# Altium PCB PCB_PreDesign.PcbDoc
Units mil, origin at the board's own origin, x right, y up, seen from the top; angles counter-clockwise.
Board outline 6000 x 4000 mil, 2 copper layers (Top Layer, Bottom Layer); 24 components, 19 nets, 108 pads, 1 vias.
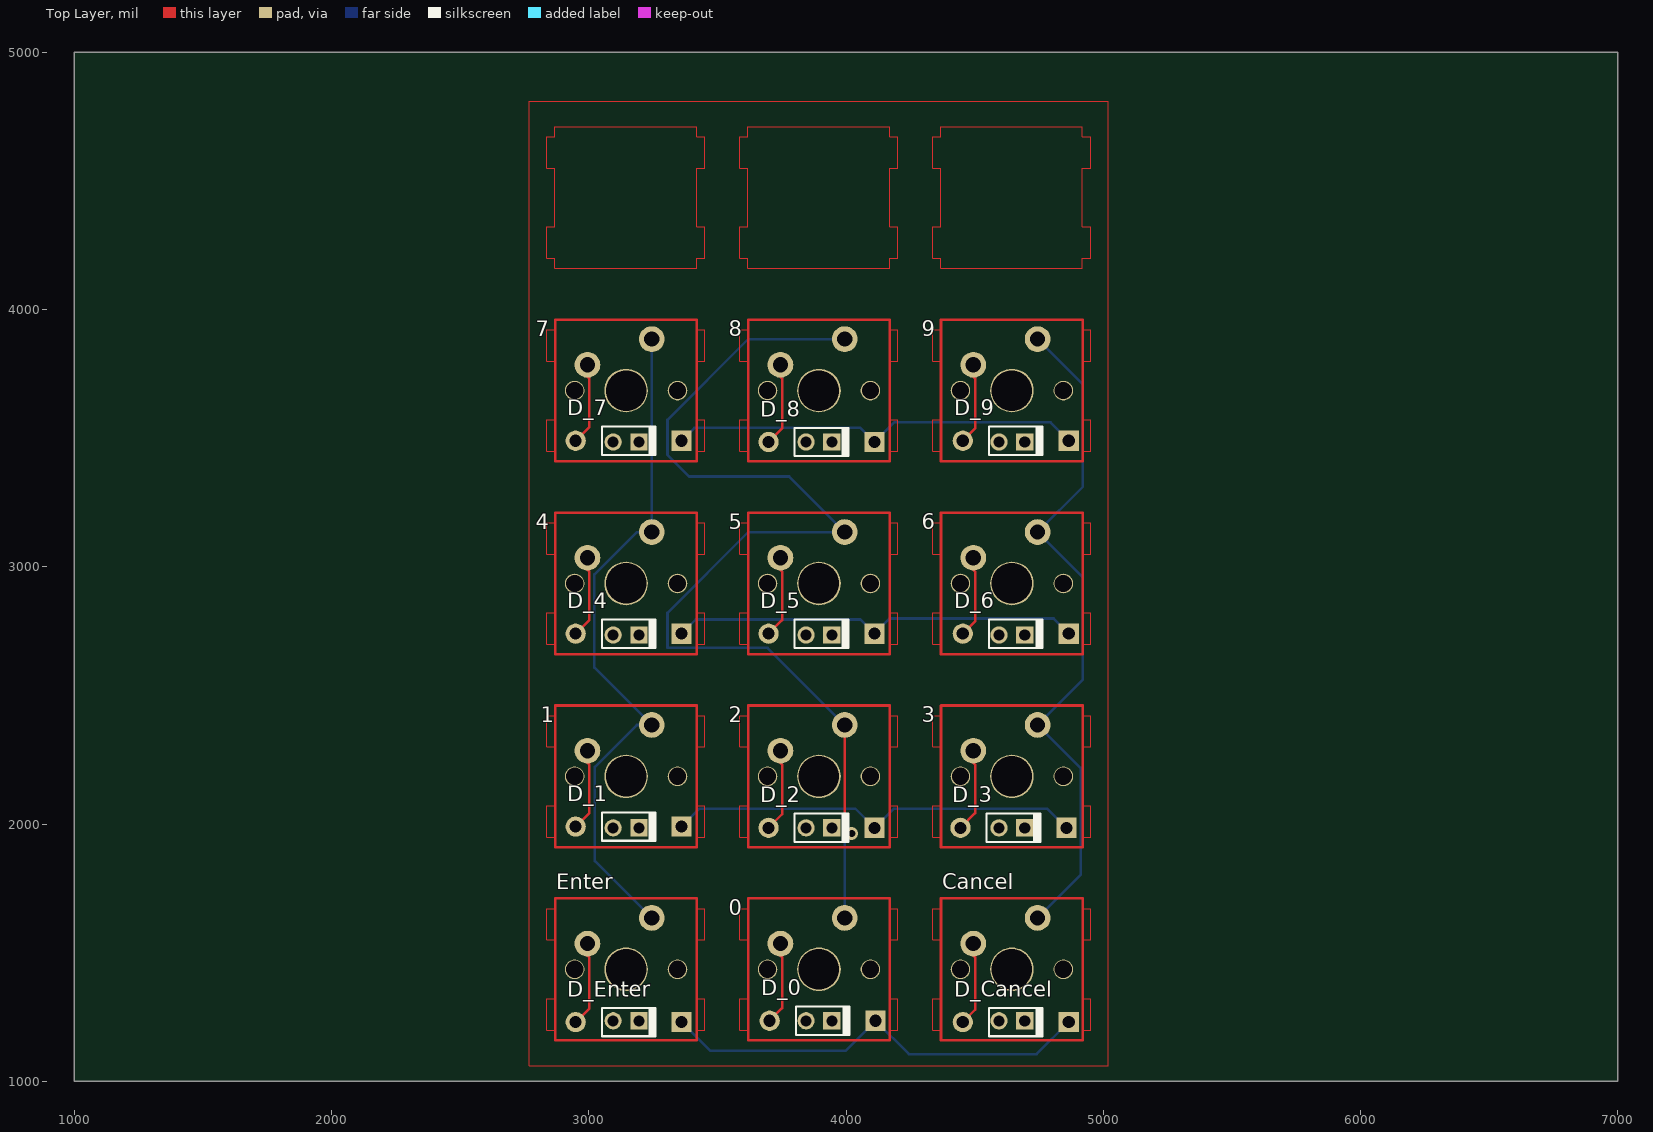
[diagram p0: Top Layer view]
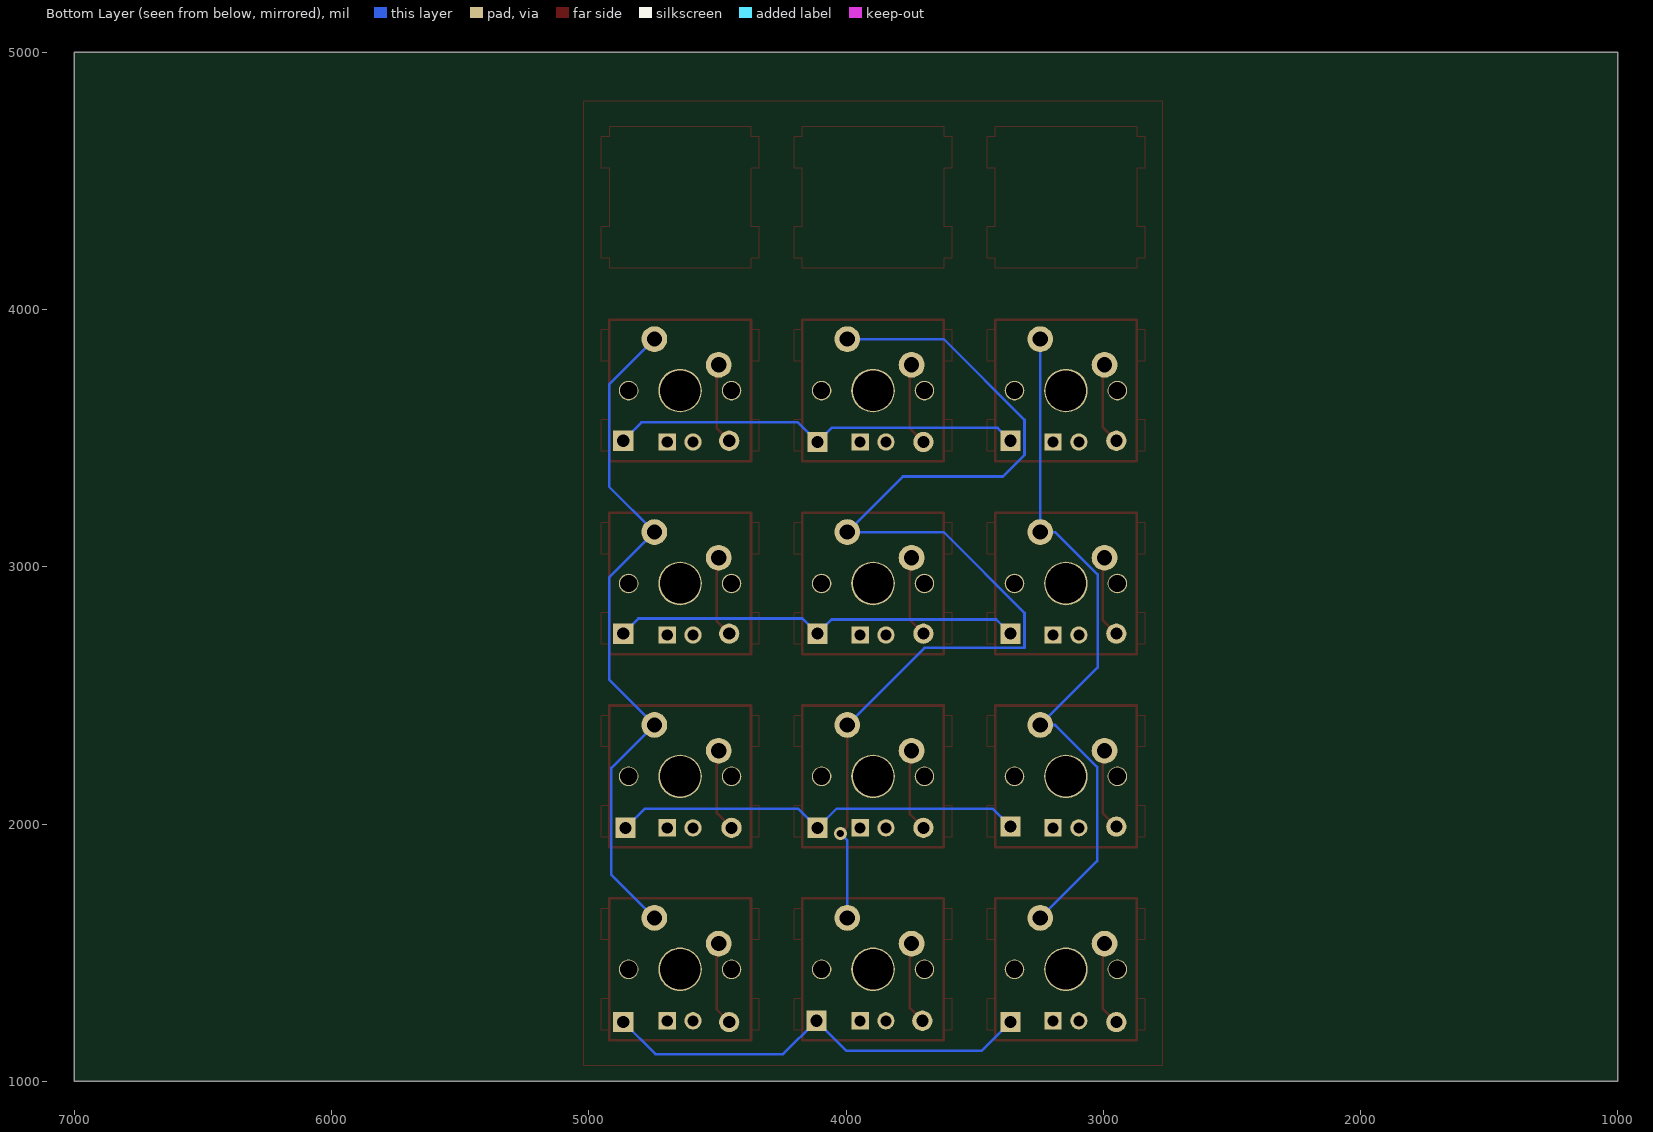
[diagram p1: Bottom Layer view, seen from below]

## Layer stack, top to bottom
Top Solder: solder mask 0.4, Solder Resist, Dk 3.5
Top Layer: signal copper 1.4
Dielectric 1: dielectric 12.6, FR-4, Dk 4.8
Bottom Layer: signal copper 1.4
Bottom Solder: solder mask 0.4, Solder Resist, Dk 3.5

## Board outline
1000,1000 7000,1000 7000,5000 1000,5000

## Design rules (kind name [scope] priority, off if disabled: settings)
Clearance [All] p1: gap=10 ignorepadtopadclearanceinfootprint=FALSE except(0: Arc-Hole Track-Hole SMDPad-Hole THPad-Hole Via-Hole Fill-Hole Poly-Hole Region-Hole Text-Hole)
PolygonConnect [All] p1: connectstyle=Relief reliefconductorwidth=10 reliefentries=4 polygonreliefangle="90 Angle" airgapwidth=10
RoutingVias [All] p1: holewidth=28 width=50 viastyle="Through Hole" minholewidth=28 minwidth=50 maxholewidth=28 maxwidth=50
SolderMaskExpansion [All] p1: expansion=4
Width [All] p1: maxlimit=10 minlimit=10 preferedwidth=10
30 further rules are at their usual default settings.

## Components (designator, comment, footprint, x,y, rotation, side; value= is the part's Value field where it differs from the comment)
0 "Key0" "Cherry Standard MX Switch" 3895,1435 r0 top
1 "Key1" "Cherry Standard MX Switch" 3145,2185 r0 top
2 "Key2" "Cherry Standard MX Switch" 3895,2185 r0 top
3 "Key3" "Cherry Standard MX Switch" 4645,2185 r0 top
4 "Key4" "Cherry Standard MX Switch" 3145,2935 r0 top
5 "Key5" "Cherry Standard MX Switch" 3895,2935 r0 top
6 "Key6" "Cherry Standard MX Switch" 4645,2935 r0 top
7 "Key7" "Cherry Standard MX Switch" 3145,3685 r0 top
8 "Key8" "Cherry Standard MX Switch" 3895,3685 r0 top
9 "Key9" "Cherry Standard MX Switch" 4645,3685 r0 top
Cancel "Key_Cancel" "Cherry Standard MX Switch" 4645,1435 r0 top
D_0 "Diode 1N4934" DO-41 3909.09,1235 r0 top
D_1 "Diode 1N4934" DO-41 3155,1990 r0 top
D_2 "Diode 1N4934" DO-41 3905,1985 r0 top
D_3 "Diode 1N4934" DO-41 4650.91,1985 r0 top
D_4 "Diode 1N4934" DO-41 3155,2740 r0 top
D_5 "Diode 1N4934" DO-41 3905,2740 r0 top
D_6 "Diode 1N4934" DO-41 4660,2740 r0 top
D_7 "Diode 1N4934" DO-41 3155,3490 r0 top
D_8 "Diode 1N4934" DO-41 3905,3485 r0 top
D_9 "Diode 1N4934" DO-41 4660,3490 r0 top
D_Cancel "Diode 1N4934" DO-41 4660,1230 r0 top
D_Enter "Diode 1N4934" DO-41 3155,1230 r0 top
Enter "Key_Enter" "Cherry Standard MX Switch" 3145,1435 r0 top

## Footprints (in the part's own frame and the unit in brackets; to place one, negate y for a bottom-side part, rotate by r counter-clockwise, add the part's x,y. Pads: shape width x height; smd on the part's side, far side on the other; paste and mask are expansions set on the pad)
"Cherry Standard MX Switch" [mm]
  round 2.54 hole 1.5: 0(-3.81,2.54) 1(2.54,5.08)
  round 1.702 hole 1.092: 2(-1.27,-5.08)
  rect 1.702x1.702 hole 1.092: 3(1.27,-5.08)
  round 4.3 hole 4: 4(0,0)
  round 1.93 hole 1.712 unplated: 5(5.08,0)
  round 1.93 hole 1.712: 6(-5.08,0)
  Top Layer lines w0.254: -7,-7 -7,7 7,7 7,-7 -7,-7
DO-41 [mm] "Diode, Axial; Body 5.2 x 2.7 mm (LxDia. max), Lead Dia. 0.86 mm (max)"
  round 2 hole 1.2: 1(-5.23,0)
  rect 2x2 hole 1.2: 2(5.23,0)
  silkscreen extent -2.65,-1.4 2.75,1.4

## Part data
0 1 2 3 4 5 6 7 8 9 Cancel Enter: library part "Cherry MX"
D_0 D_1 D_2 D_3 D_4 D_5 D_6 D_7 D_8 D_9 D_Cancel D_Enter: "1 Amp Fast Recovery Rectifier", Code_JEDEC=DO-204-AL, ComponentLink1Description="Manufacturer Link", ComponentLink1URL=http://www.fairchildsemi.com/, ComponentLink2Description=Datasheet, ComponentLink2URL=http://www.fairchildsemi.com/ds/1N%2F1N4934.pdf, DatasheetVersion=1999, LatestRevisionDate=17-Jul-2002, LatestRevisionNote="Re-released for DXP Platform.", PackageDescription="Diode, Axial; Body 5.2 x 2.7 mm (LxDia. max), Lead Dia. 0.86 mm (max)", PackageReference=DO-41, PackageVersion=Aug-1999, Published=8-Jun-2000, Publisher="Altium Limited"

## Via types
v1: diameter 50, hole 28, Top Layer to Bottom Layer, 1 vias

## Nets (pads, with @x,y where several pads share a name; then routed paths per layer and width w, separated by ;. In a path a pad name is that pad's centre, name@x,y a point inside that pad or via, vN(x,y) a via of type N, cw(c..) or ccw(c..) an arc to the next point about the centre after c; other vN are vias at no path point)
Net0_0: 0.0 D_0.1 | length 323.1
  Top Layer w10: D_0.1 3752,1283.81 3752,1481 3745,1488 0.0
Net0_1: 0.1 2.1 5.1 8.1 | length 4309
  Top Layer w10: 2.1 3995,1990 v1(4022,1963)
  Bottom Layer w10: 0.1 3995,1936 v1(4022,1963) ; 2.1 3695,2685 3306,2685 3306,2821 3620,3135 5.1 3779,3351 3390,3351 3306,3435 3306,3571 3620,3885 8.1
Net1_0: 1.0 D_1.1 | length 319.8
  Top Layer w10: D_1.1 3002,2042.91 3002,2231 2995,2238 1.0
Net1_1: 1.1 4.1 7.1 Enter.1 | length 2685.9
  Bottom Layer w10: Enter.1 3024,1856 3024,2222.08 3186.92,2385 1.1 3022,2608 3022,2970.08 3186.92,3135 4.1 7.1
Net2_0: 2.0 D_2.1 | length 324.8
  Top Layer w10: D_2.1 3752,2037.91 3752,2231 3745,2238 2.0
Net3_0: 3.0 D_3.1 | length 326.5
  Top Layer w10: D_3.1 4502,2042 4502,2231 4495,2238 3.0
Net3_1: 3.1 6.1 9.1 Cancel.1 | length 2680
  Bottom Layer w10: Cancel.1 4912,1802 4912,2218 3.1 4921,2561 4921,2959 6.1 4921,3311 4921,3709 9.1
Net4_0: 4.0 D_4.1 | length 319.8
  Top Layer w10: D_4.1 3002,2792.91 3002,2981 2995,2988 4.0
Net5_0: 5.0 D_5.1 | length 319.8
  Top Layer w10: D_5.1 3752,2792.91 3752,2981 3745,2988 5.0
Net6_0: 6.0 D_6.1 | length 317.7
  Top Layer w10: D_6.1 4502,2787.91 4502,2981 4495,2988 6.0
Net7_0: 7.0 D_7.1 | length 319.8
  Top Layer w10: D_7.1 3002,3542.91 3002,3731 2995,3738 7.0
Net8_0: 8.0 D_8.1 | length 324.8
  Top Layer w10: D_8.1 3752,3537.91 3752,3731 3745,3738 8.0
Net9_0: 9.0 D_9.1 | length 317.7
  Top Layer w10: D_9.1 4502,3537.91 4502,3731 4495,3738 9.0
NetCancel_0: Cancel.0 D_Cancel.1 | length 327.7
  Top Layer w10: D_Cancel.1 4502,1277.91 4502,1481 4495,1488 Cancel.0
NetD_0_2: D_0.2 D_Cancel.2 D_Enter.2 | length 1705.5
  Bottom Layer w10: D_Enter.2 3472.91,1118 3998,1118 D_0.2 4245,1105 4740.91,1105 D_Cancel.2
NetD_1_2: D_1.2 D_2.2 D_3.2 | length 1618.1
  Bottom Layer w10: D_1.2 3430.91,2060 4035.91,2060 D_2.2 4185.91,2060 4781.81,2060 D_3.2
NetD_4_2: D_4.2 D_5.2 D_6.2 | length 1599.4
  Bottom Layer w10: D_4.2 3415.91,2795 4055.91,2795 D_5.2 4169.91,2799 4806.91,2799 D_6.2
NetD_7_2: D_7.2 D_8.2 D_9.2 | length 1609.4
  Bottom Layer w10: D_7.2 3410.91,3540 4055.91,3540 D_8.2 4186.91,3561 4794.91,3561 D_9.2
NetD_Enter_1: D_Enter.1 Enter.0 | length 329.8
  Top Layer w10: D_Enter.1 3002,1282.91 3002,1481 2995,1488 Enter.0
pads on no net: 0.2 0.3 0.4 0.5 0.6 1.2 1.3 1.4 1.5 1.6 2.2 2.3 2.4 2.5 2.6 3.2 3.3 3.4 3.5 3.6 4.2 4.3 4.4 4.5 4.6 5.2 5.3 5.4 5.5 5.6 6.2 6.3 6.4 6.5 6.6 7.2 7.3 7.4 7.5 7.6 8.2 8.3 8.4 8.5 8.6 9.2 9.3 9.4 9.5 9.6 Cancel.2 Cancel.3 Cancel.4 Cancel.5 Cancel.6 Enter.2 Enter.3 Enter.4 Enter.5 Enter.6
copper on no net: | length 48852.3
  Top Layer w0.5: 2768.74,1060.15 2768.74,4810.14 5018.75,4810.14 5018.75,1060.15 2768.74,1060.15 ; 2836.61,1198.93 2868.14,1198.93 2868.14,1159.59 3419.3,1159.59 3419.3,1198.93 3450.82,1198.93 3450.82,1321 3419.3,1321 3419.3,1549.4 3450.82,1549.4 3450.82,1671.37 3419.3,1671.37 3419.3,1710.75 2868.14,1710.75 2868.14,1671.37 2836.61,1671.37 2836.61,1549.4 2868.14,1549.4 2868.14,1321 2836.61,1321 2836.61,1198.93 ; 2836.61,1948.93 2868.14,1948.93 2868.14,1909.59 3419.3,1909.59 3419.3,1948.93 3450.82,1948.93 3450.82,2071 3419.3,2071 3419.3,2299.4 3450.82,2299.4 3450.82,2421.37 3419.3,2421.37 3419.3,2460.75 2868.14,2460.75 2868.14,2421.37 2836.61,2421.37 2836.61,2299.4 2868.14,2299.4 2868.14,2071 2836.61,2071 2836.61,1948.93 ; 2836.61,2698.93 2868.14,2698.93 2868.14,2659.6 3419.3,2659.6 3419.3,2698.93 3450.82,2698.93 3450.82,2821 3419.3,2821 3419.3,3049.35 3450.82,3049.35 3450.82,3171.36 3419.3,3171.36 3419.3,3210.75 2868.14,3210.75 2868.14,3171.36 2836.61,3171.36 2836.61,3049.35 2868.14,3049.35 2868.14,2821 2836.61,2821 2836.61,2698.93 ; 2836.61,3448.93 2868.14,3448.93 2868.14,3409.6 3419.3,3409.6 3419.3,3448.93 3450.82,3448.93 3450.82,3571 3419.3,3571 3419.3,3799.35 3450.82,3799.35 3450.82,3921.36 3419.3,3921.36 3419.3,3960.75 2868.14,3960.75 2868.14,3921.36 2836.61,3921.36 2836.61,3799.35 2868.14,3799.35 2868.14,3571 2836.61,3571 2836.61,3448.93 ; 2836.61,4198.93 2868.14,4198.93 2868.14,4159.6 3419.3,4159.6 3419.3,4198.93 3450.82,4198.93 3450.82,4321 3419.3,4321 3419.3,4549.35 3450.82,4549.35 3450.82,4671.36 3419.3,4671.36 3419.3,4710.75 2868.14,4710.75 2868.14,4671.36 2836.61,4671.36 2836.61,4549.35 2868.14,4549.35 2868.14,4321 2836.61,4321 2836.61,4198.93 ; 3586.61,1198.93 3618.14,1198.93 3618.14,1159.59 4169.29,1159.59 4169.29,1198.93 4200.82,1198.93 4200.82,1321 4169.29,1321 4169.29,1549.4 4200.82,1549.4 4200.82,1671.37 4169.29,1671.37 4169.29,1710.75 3618.14,1710.75 3618.14,1671.37 3586.61,1671.37 3586.61,1549.4 3618.14,1549.4 3618.14,1321 3586.61,1321 3586.61,1198.93 ; 3586.61,1948.93 3618.14,1948.93 3618.14,1909.59 4169.29,1909.59 4169.29,1948.93 4200.82,1948.93 4200.82,2071 4169.29,2071 4169.29,2299.4 4200.82,2299.4 4200.82,2421.37 4169.29,2421.37 4169.29,2460.75 3618.14,2460.75 3618.14,2421.37 3586.61,2421.37 3586.61,2299.4 3618.14,2299.4 3618.14,2071 3586.61,2071 3586.61,1948.93 ; 3586.61,2698.93 3618.14,2698.93 3618.14,2659.6 4169.29,2659.6 4169.29,2698.93 4200.82,2698.93 4200.82,2821 4169.29,2821 4169.29,3049.35 4200.82,3049.35 4200.82,3171.36 4169.29,3171.36 4169.29,3210.75 3618.14,3210.75 3618.14,3171.36 3586.61,3171.36 3586.61,3049.35 3618.14,3049.35 3618.14,2821 3586.61,2821 3586.61,2698.93 ; 3586.61,3448.93 3618.14,3448.93 3618.14,3409.6 4169.29,3409.6 4169.29,3448.93 4200.82,3448.93 4200.82,3571 4169.29,3571 4169.29,3799.35 4200.82,3799.35 4200.82,3921.36 4169.29,3921.36 4169.29,3960.75 3618.14,3960.75 3618.14,3921.36 3586.61,3921.36 3586.61,3799.35 3618.14,3799.35 3618.14,3571 3586.61,3571 3586.61,3448.93 ; 3586.61,4198.93 3618.14,4198.93 3618.14,4159.6 4169.29,4159.6 4169.29,4198.93 4200.82,4198.93 4200.82,4321 4169.29,4321 4169.29,4549.35 4200.82,4549.35 4200.82,4671.36 4169.29,4671.36 4169.29,4710.75 3618.14,4710.75 3618.14,4671.36 3586.61,4671.36 3586.61,4549.35 3618.14,4549.35 3618.14,4321 3586.61,4321 3586.61,4198.93 ; 4336.61,1198.93 4368.14,1198.93 4368.14,1159.59 4919.29,1159.59 4919.29,1198.93 4950.82,1198.93 4950.82,1321 4919.29,1321 4919.29,1549.4 4950.82,1549.4 4950.82,1671.37 4919.29,1671.37 4919.29,1710.75 4368.14,1710.75 4368.14,1671.37 4336.61,1671.37 4336.61,1549.4 4368.14,1549.4 4368.14,1321 4336.61,1321 4336.61,1198.93 ; 4336.61,1948.93 4368.14,1948.93 4368.14,1909.59 4919.29,1909.59 4919.29,1948.93 4950.82,1948.93 4950.82,2071 4919.29,2071 4919.29,2299.4 4950.82,2299.4 4950.82,2421.37 4919.29,2421.37 4919.29,2460.75 4368.14,2460.75 4368.14,2421.37 4336.61,2421.37 4336.61,2299.4 4368.14,2299.4 4368.14,2071 4336.61,2071 4336.61,1948.93 ; 4336.61,2698.93 4368.14,2698.93 4368.14,2659.6 4919.29,2659.6 4919.29,2698.93 4950.82,2698.93 4950.82,2821 4919.29,2821 4919.29,3049.35 4950.82,3049.35 4950.82,3171.36 4919.29,3171.36 4919.29,3210.75 4368.14,3210.75 4368.14,3171.36 4336.61,3171.36 4336.61,3049.35 4368.14,3049.35 4368.14,2821 4336.61,2821 4336.61,2698.93 ; 4336.61,3448.93 4368.14,3448.93 4368.14,3409.6 4919.29,3409.6 4919.29,3448.93 4950.82,3448.93 4950.82,3571 4919.29,3571 4919.29,3799.35 4950.82,3799.35 4950.82,3921.36 4919.29,3921.36 4919.29,3960.75 4368.14,3960.75 4368.14,3921.36 4336.61,3921.36 4336.61,3799.35 4368.14,3799.35 4368.14,3571 4336.61,3571 4336.61,3448.93 ; 4336.61,4198.93 4368.14,4198.93 4368.14,4159.6 4919.29,4159.6 4919.29,4198.93 4950.82,4198.93 4950.82,4321 4919.29,4321 4919.29,4549.35 4950.82,4549.35 4950.82,4671.36 4919.29,4671.36 4919.29,4710.75 4368.14,4710.75 4368.14,4671.36 4336.61,4671.36 4336.61,4549.35 4368.14,4549.35 4368.14,4321 4336.61,4321 4336.61,4198.93